# Altium PCB SourceSelection.PcbDoc
Units mil, origin at the board's own origin, x right, y up, seen from the top; angles counter-clockwise.
Board outline 4653.05 x 2238.44 mil, 2 copper layers (Top Layer, Bottom Layer); 39 components, 45 nets, 189 pads, 12 vias.
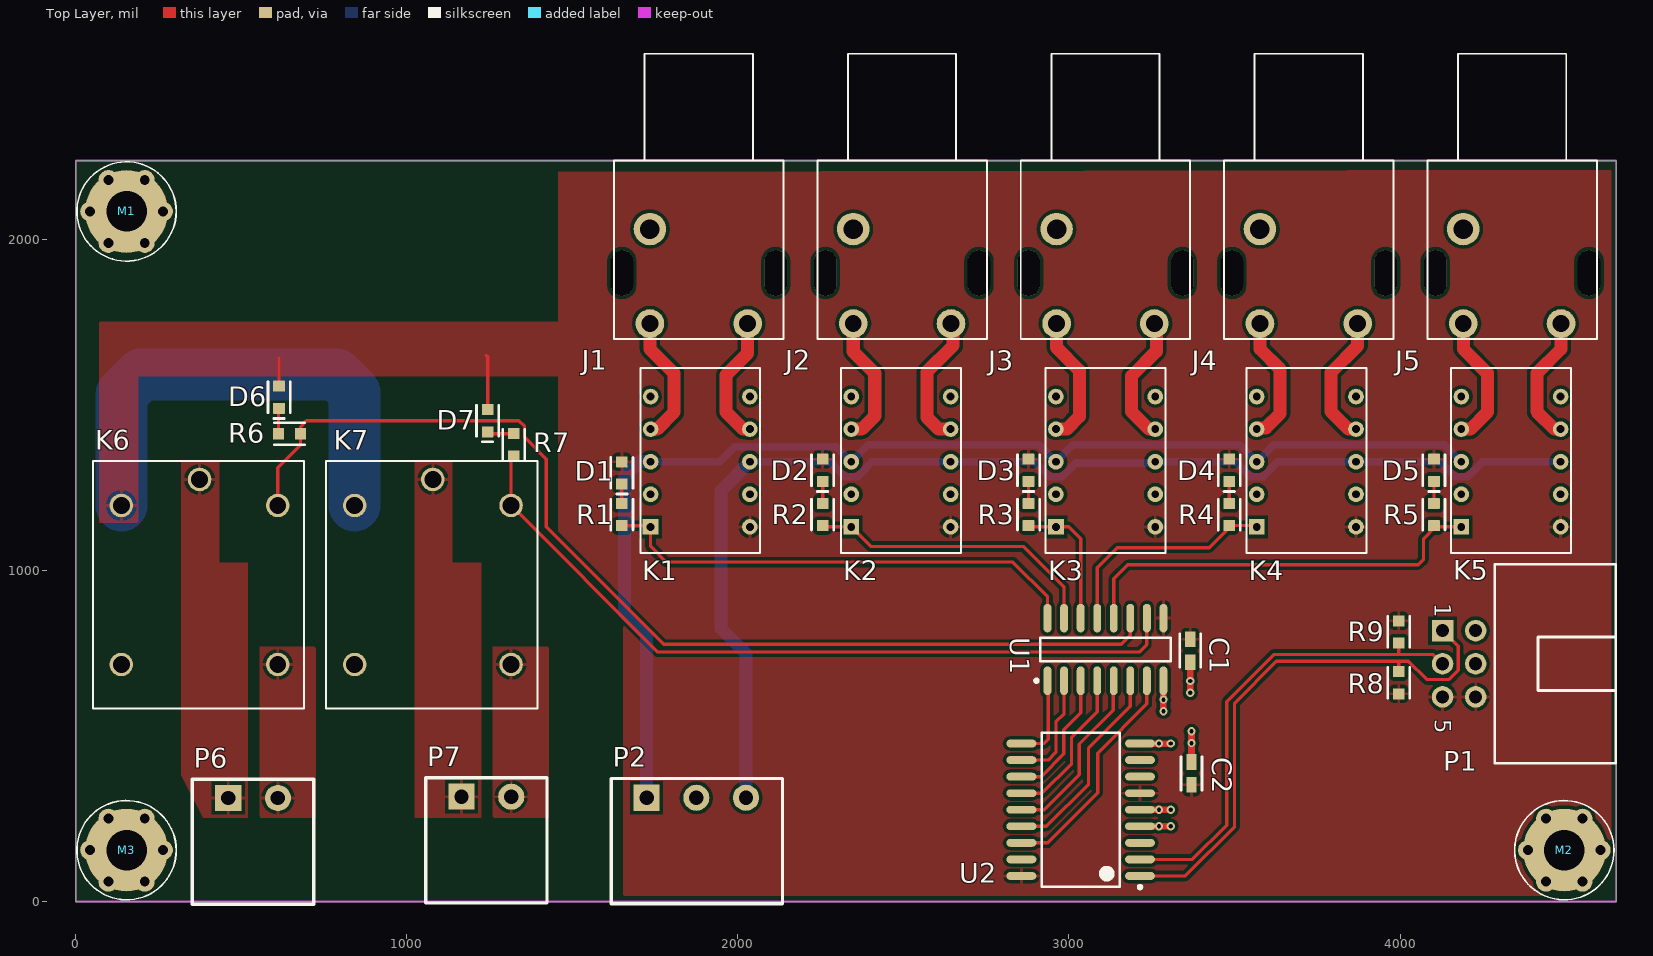
[diagram p0: Top Layer view]
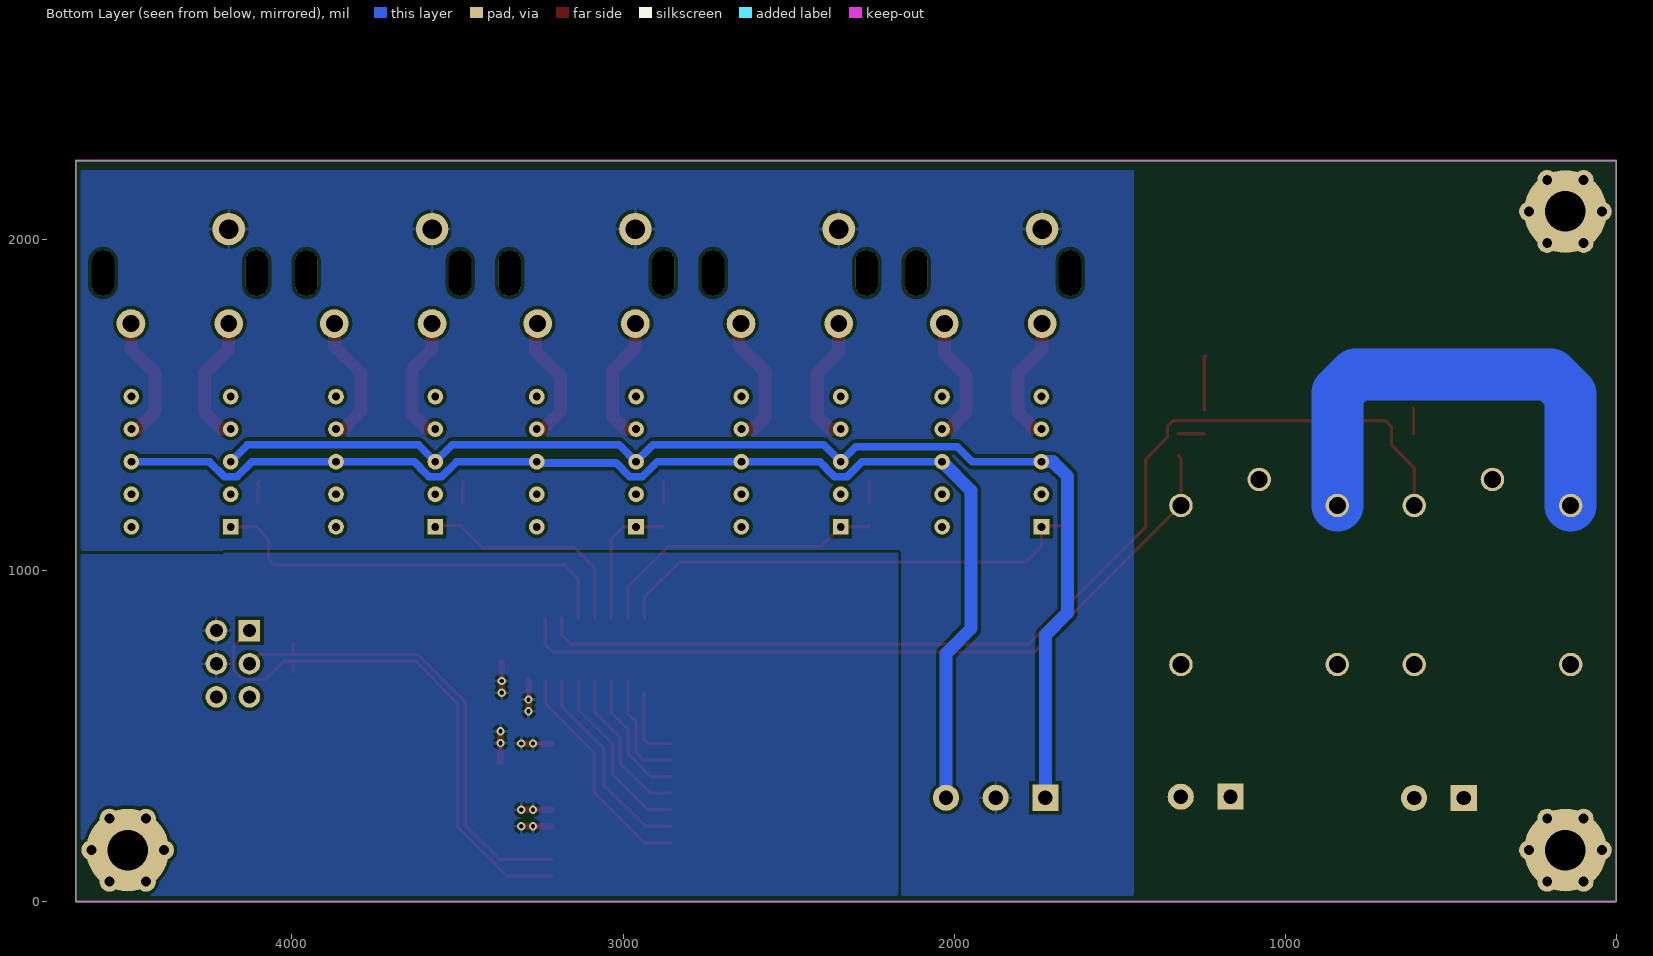
[diagram p1: Bottom Layer view, seen from below]
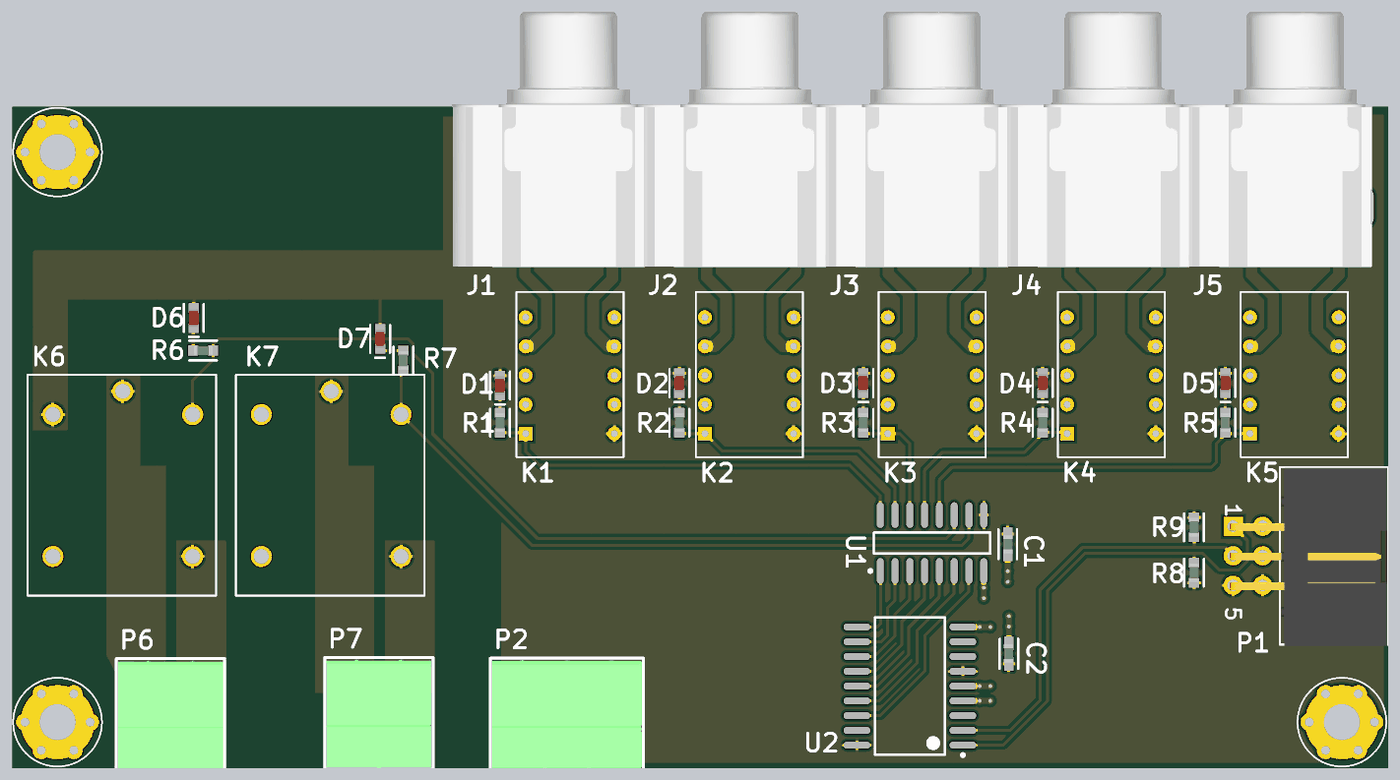
[diagram p2: 3D render of the assembled board from above, using the file's embedded part models]

## Layer stack, top to bottom
Top Solder: solder mask 0.4, Solder Resist, Dk 3.5
Top Layer: signal copper 1.4
Dielectric1: dielectric 12.6, FR-4, Dk 4.8
Bottom Layer: signal copper 1.4
Bottom Solder: solder mask 0.4, Solder Resist, Dk 3.5

## Board outline
0,0 4653.05,0 4653.05,2238.44 0,2238.44

## Design rules (kind name [scope] priority, off if disabled: settings)
Clearance [All] p1: gap=10
HoleSize [All] p1: absolutevalues=TRUE maxlimit=787.4 minlimit=12.99 maxpercent=80.000 minpercent=20.000
PolygonConnect [All] p1: connectstyle=Relief reliefconductorwidth=10 reliefentries=4 polygonreliefangle="90 Angle" airgapwidth=10
RoutingVias [All] p1: holewidth=28 width=50 viastyle="Through Hole" minholewidth=28 minwidth=50 maxholewidth=28 maxwidth=50
SilkToSolderMaskClearance SilkscreenOverComponentPads [IsPad] p1: minsilkscreentomaskgap=0 clearancetoexposedcopper=TRUE
SolderMaskExpansion [All] p1: expansion=4
Width [All] p1: maxlimit=393.7 minlimit=6 preferedwidth=10
28 further rules are at their usual default settings.

## Components (designator, comment, footprint, x,y, rotation, side; value= is the part's Value field where it differs from the comment)
C1 "GCM188R71C105KA64D" CAPC1608 3366.14,758.12 r90 top
C2 "GCM188R71C105KA64D" CAPC1608 3370.08,387.55 r270 top
D1 "LTST-C191KGKT" LEDC1608M_AK 1649.61,1295.28 r270 top
D2 "LTST-C191KGKT" LEDC1608M_AK 2255.91,1303.15 r270 top
D3 "LTST-C191KGKT" LEDC1608M_AK 2877.95,1303.15 r270 top
D4 "LTST-C191KGKT" LEDC1608M_AK 3484.25,1303.15 r270 top
D5 "LTST-C191KGKT" LEDC1608M_AK 4102.36,1303.15 r270 top
D6 "LTST-C191KGKT" LEDC1608M_AK 614.17,1523.62 r270 top
D7 "LTST-C191KGKT" LEDC1608M_AK 1244.09,1452.76 r270 top
J1 "RCA" PJRAS1X2S01AUX 1881.89,2238.44 r180 top
J2 "RCA" PJRAS1X2S01AUX 2496.06,2238.44 r180 top
J3 "RCA" PJRAS1X2S01AUX 3110.24,2238.44 r180 top
J4 "RCA" PJRAS1X2S01AUX 3724.41,2238.44 r180 top
J5 "RCA" PJRAS1X2S01AUX 4338.58,2238.44 r180 top
K1 "Relay DPDT Small Signal" DIP-P10 1736.22,1132.14 r180 top
K2 "Relay DPDT Small Signal" DIP-P10 2342.52,1132.14 r180 top
K3 "Relay DPDT Small Signal" DIP-P10 2960.63,1132.14 r180 top
K4 "Relay DPDT Small Signal" DIP-P10 3566.93,1132.14 r180 top
K5 "Relay DPDT Small Signal" DIP-P10 4185.04,1132.14 r180 top
K6 "Relay-Standby B+" RELAY_SPDT 610.24,1196.78 r270 top
K7 "Relay-Mains 240V" RELAY_SPDT 1314.96,1196.78 r270 top
M1 "M" MOUNTING 153.54,2084.89 r0 top
M2 "M" MOUNTING 4496.06,155.76 r0 top
M3 "M" MOUNTING 153.54,155.76 r0 top
P1 "Relays" IDC2.54-H6C 4228.35,718.75 r270 top
P2 "Audio out" PH_TERM_3 1622.05,-0.98 r0 top
P6 "Standby" PH_TERM_2 358.27,-1.72 r0 top
P7 "Mains" PH_TERM_2 1062.99,2.21 r0 top
R1 "CR0603-FX-1001ELF" RESC1608 1649.61,1169.29 r90 top
R2 "CR0603-FX-1001ELF" RESC1608 2255.91,1169.29 r90 top
R3 "CR0603-FX-1001ELF" RESC1608 2877.95,1169.29 r90 top
R4 "CR0603-FX-1001ELF" RESC1608 3484.25,1169.29 r90 top
R5 "CR0603-FX-1001ELF" RESC1608 4102.36,1169.29 r90 top
R6 "CR0603-FX-1001ELF" RESC1608 645.67,1413.39 r180 top
R7 "CR0603-FX-1001ELF" RESC1608 1322.83,1380.17 r90 top
R8 "CR0603-FX-1001ELF" RESC1608 3996.06,661.42 r270 top
R9 "CR0603-FX-1001ELF" RESC1608 3996.06,814.96 r90 top
U1 "ULN2003AD" D016_N 3110.24,762.06 r90 top
U2 "MCP23008-E/SO" SOIC-SO18_N 3035.43,277.81 r180 top

## Footprints (in the part's own frame and the unit in brackets; to place one, negate y for a bottom-side part, rotate by r counter-clockwise, add the part's x,y. Pads: shape width x height; smd on the part's side, far side on the other; paste and mask are expansions set on the pad)
CAPC1608 [mm] "Chip Capacitor, Non Polarised 1.6mm x 0.8mm x ?mm (0603)"
  rrect10% 1.2x0.8 smd: 1(-0.875,0) 2(0.875,0)
  silkscreen extent -1.28,-0.8 1.28,0.8, body extent -0.8,-0.43 0.8,0.39, height 0.86
D016_N [mm] "SOIC, 16-Leads, Body 9.9x3.9mm, Pitch 1.27mm, IPC Medium Density"
  oval 2.2x0.6 smd: 1(-2.4,4.445) 2(-2.4,3.175) 3(-2.4,1.905) 4(-2.4,0.635) 5(-2.4,-0.635) 6(-2.4,-1.905) 7(-2.4,-3.175) 8(-2.4,-4.445) 9(2.4,-4.445) 10(2.4,-3.175) 11(2.4,-1.905) 12(2.4,-0.635) 13(2.4,0.635) 14(2.4,1.905) 15(2.4,3.175) 16(2.4,4.445)
  silkscreen extent -2.52,-5 0.9,5.42, body extent -2,-5 2,5, height 1.75
DIP-P10 [mm]
  rect 1.2x1.2 hole 0.6: 1(0,0)
  round 1.2 hole 0.6: 2(0,-2.5) 3(0,-5) 4(0,-7.5) 5(0,-10) 6(-7.62,-10) 7(-7.62,-7.5) 8(-7.62,-5) 9(-7.62,-2.5) 10(-7.62,0)
  silkscreen extent -8.41,-12.18 0.79,2.02, body extent -8.38,-12.19 0.76,2.03, height 5.4
IDC2.54-H6C [mm] "Connector; IDC, Low Profile Male Header, Thru-Hole; 6 Position; Right Angle; Pitch 2.54 mm; Body 15.24 x 8.9 x 9.2 mm (LxWxH)"
  rect 1.65x1.65 hole 1: 1(-2.54,-2.54)
  round 1.65 hole 1: 2(-2.54,0) 3(0,-2.54) 4(0,0) 5(2.54,-2.54) 6(2.54,0)
  silkscreen extent -7.62,1.48 7.62,10.75, body extent -7.56,-2.85 7.71,10.7, height 9.43
LEDC1608M_AK [mm] "LED, Chip, 0603"
  rrect10% 0.85x0.9 smd: A(-0.85,0) K(0.85,0)
  silkscreen extent -1.18,-0.85 1.62,0.85, body extent -0.8,-0.4 0.8,0.39, height 1.09
MOUNTING [mil]
  round 250 hole 122.05: 1(0,0)
  round 60 hole 30: 2(-55,95.26) 3(55,95.26) 4(110,0) 5(55,-95.26) 6(-55,-95.26) 7(-110,0)
  silkscreen extent -150,-150 150,150
PH_TERM_2 [mm] "Phoenix Terminal 2 way pluggable"
  rect 2x2 hole 1.1: 1(2.6,8)
  round 2 hole 1.1: 2(6.41,8)
  silkscreen extent -0.15,-0.15 9.15,9.45, body extent 0,0 9.01,9.3, height 7.25
PH_TERM_3 [mm] "Phoenix Terminal 3 way pluggable"
  rect 2x2 hole 1.1: 1(2.6,8)
  round 2 hole 1.1: 2(6.41,8) 3(10.22,8)
  silkscreen extent -0.13,-0.12 13.03,9.48, body extent 0.03,0.03 12.84,9.32, height 7.25
PJRAS1X2S01AUX [mm] "DUAL RCA PCB"
  oval 1.7x3.5 hole 1.7 slot 3.5 at 90 deg unplated: 0(-5.896,8.623) 0(5.896,8.623)
  round 2.5 hole 1.5: 1(3.75,5.25)
  round 2.2 hole 1.3: 2(-3.75,12.5) 3(3.75,12.5)
  silkscreen extent -6.5,-8.2 6.5,13.7, body extent -6.47,-8.17 10.03,13.72, height 28.5
RELAY_SPDT [mm] "JQ3FF-24"
  round 1.8 hole 1.3: 1(0,0) 2(-2,-6) 3(0,-12) 4(12.2,-12) 5(12.2,0)
  silkscreen extent -3.43,-14.18 15.57,2.02, body extent -3.43,-14.1 15.49,2.03, height 15.5
RESC1608 [mm] "Chip Resistor, 1.6mm x 0.8mm x ?mm (0603)"
  rrect10% 0.85x0.9 smd: 1(-0.85,0) 2(0.85,0)
  silkscreen extent -1.18,-0.85 1.18,0.85, body extent -0.8,-0.4 0.8,0.4, height 0.4
SOIC-SO18_N [mm] "SOIC, 18-Leads, Body 11.5x7.5mm, Pitch 1.27mm, IPC Medium Density"
  oval 2.3x0.6 smd: 1(-4.55,5.08) 2(-4.55,3.81) 3(-4.55,2.54) 4(-4.55,1.27) 5(-4.55,0) 6(-4.55,-1.27) 7(-4.55,-2.54) 8(-4.55,-3.81) 9(-4.55,-5.08) 10(4.55,-5.08) 11(4.55,-3.81) 12(4.55,-2.54) 13(4.55,-1.27) 14(4.55,0) 15(4.55,1.27) 16(4.55,2.54) 17(4.55,3.81) 18(4.55,5.08)
  silkscreen extent -4.67,-5.9 3,6.05, body extent -3.8,-5.87 3.8,5.87, height 2.65

## Part data
C1 C2: "Multilayer Ceramic Capacitors MLCC - SMD/SMT 0603 1.0uF 16volts X7R 10%"
D1 D2 D3 D4 D5 D6 D7: "LED GREEN CLEAR 0603 SMD"
J1 J2 J3 J4 J5: library part "RCA Dual PCB"
K6 K7: library part "Relay SPDT"
M1 M2 M3: library part MOUNTING, "MOUNTING HOLE - NON INSTALLABLE"
P1: library part "Header 3X2H", "Header, 3-Pin, Dual row, Right Angle"
P2: library part "Header 3", "Header, 3-Pin"
P6 P7: library part "Header 2", "Header, 2-Pin"
R1 R2 R3 R4 R5 R6 R7 R8 R9: "RES SMD 1K OHM 1% 1/10W 0603"
U1: "Darlington Transistor Array"
U2: "8-Bit I/O Expander with Serial Interface, 18-Pin SOIC, Extended Temperature"

## Via types
v1: diameter 25, hole 13, Top Layer to Bottom Layer, tented both sides, 12 vias

## Nets (pads, with @x,y where several pads share a name; then routed paths per layer and width w, separated by ;. In a path a pad name is that pad's centre, name@x,y a point inside that pad or via, vN(x,y) a via of type N, cw(c..) or ccw(c..) an arc to the next point about the centre after c; other vN are vias at no path point)
AGND: J1.1 J2.1 J3.1 J4.1 J5.1 P2.2
AU_L: K1.3 K2.3 K3.3 K4.3 K5.3 P2.1 | length 3709.2
  Bottom Layer w23.62: K1.3 1945.35,1328.99 1990.79,1374.42 2297.09,1374.42 K2.3 2393.7,1380.17 2909.45,1380.17 K3.3 3011.81,1380.17 3515.75,1380.17 K4.3 3618.11,1380.17 4133.86,1380.17 K5.3
  Bottom Layer w39.37: P2.1 1724.41,805.36 1657.48,872.29 1657.48,1284.68 1701.78,1328.99 K1.3
AU_R: K1.8 K2.8 K3.8 K4.8 K5.8 P2.3 | length 3683.4
  Bottom Layer w23.62: K1.8 2278.27,1328.99 2323.7,1283.55 2361.34,1283.55 2387.95,1310.17 2387.95,1311.43 2405.51,1328.99 K2.8 2896.38,1328.99 2941.81,1283.55 2979.45,1283.55 3020.94,1325.05 3256.69,1325.05 K3.8 3502.68,1328.99 3548.11,1283.55 3585.75,1283.55 3612.36,1310.17 3612.36,1311.43 3629.92,1328.99 K4.8 4120.79,1328.99 4166.22,1283.55 4203.86,1283.55 4249.29,1328.99 K5.8
  Bottom Layer w39.37: P2.3 2024.41,749.46 1948.82,825.05 1948.82,1241.58 K1.8
GND: C1.1 C2.1 P1.2 P1.4 U1.8 U2.4 U2.5 U2.9 | length 555.1
  Top Layer w19.68: U2.4 v1(3307.09,227.81) ; U2.5 v1(3307.09,277.81) ; U2.9 v1(3307.09,477.81) ; v1(3285.24,575.05) U1.8 ; v1(3366.14,631.15) C1.1 ; C2.1 v1(3370.08,514.52)
  other v1: 3271.65,227.81 3271.65,277.81 3271.65,477.81 3370.08,479.08 3285.24,610.48 3366.14,666.58
NetD1_K: D1.K R1.2 | length 59.1
  Top Layer w10: R1.2 D1.K
NetD2_K: D2.K R2.2 | length 66.9
  Top Layer w10: R2.2 D2.K
NetD3_K: D3.K R3.2 | length 66.9
  Top Layer w10: R3.2 D3.K
NetD4_K: D4.K R4.2 | length 66.9
  Top Layer w10: R4.2 D4.K
NetD5_K: D5.K R5.2 | length 68.6
  Top Layer w10: D5.K@4098.43,1269.68 4102.36,1265.75 R5.2
NetD6_K: D6.K R6.2 | length 77.6
  Top Layer w10: R6.2 612.2,1488.19 D6.K
NetD7_K: D7.K R7.2 | length 76.9
  Top Layer w10: D7.K@1246.06,1413.39 1246.31,1413.63 R7.2
NetJ1_2: J1.2 K1.7 | length 387.5
  Top Layer w39.37: J1.2 2029.53,1656.36 1964.57,1591.4 1964.57,1478.59 2015.75,1427.41 K1.7
NetJ1_3: J1.3 K1.4 | length 390
  Top Layer w39.37: J1.3 1734.25,1669.54 1807.09,1596.7 1807.09,1478.59 1755.91,1427.41 K1.4
NetJ2_2: J2.2 K2.7 | length 404.9
  Top Layer w39.37: K2.7 2606.3,1427.41 2570.87,1462.84 2570.87,1600.64 2649.61,1679.38 2649.61,1740.4 J2.2
NetJ2_3: J2.3 K2.4 | length 393.6
  Top Layer w39.37: K2.4 2374.02,1427.41 2413.39,1466.78 2413.39,1596.7 2348.43,1661.66 J2.3
NetJ3_2: J3.2 K3.7 | length 393
  Top Layer w39.37: J3.2 3263.78,1740.4 3263.78,1662.67 3188.98,1587.87 3188.98,1480.32 3241.88,1427.41 K3.7
NetJ3_3: J3.3 K3.4 | length 395.9
  Top Layer w39.37: K3.4 2993.31,1427.41 3031.5,1465.6 3031.5,1604.58 2962.6,1673.47 J3.3
NetJ4_2: J4.2 K4.7 | length 396.9
  Top Layer w10: J4.2@3872.05,1726.62 J4.2
  Top Layer w39.37: K4.7 3844.24,1427.41 3791.34,1480.31 3791.34,1598.43 3872.05,1679.13 J4.2@3872.05,1726.62
NetJ4_3: J4.3 K4.4 | length 385.7
  Top Layer w39.37: K4.4@3566.93,1431.35 3594.49,1431.35 3637.8,1474.66 3637.8,1608.51 3576.77,1669.54 J4.3
NetJ5_2: J5.2 K5.7 | length 389.7
  Top Layer w39.37: K5.7 4466.29,1427.41 4413.39,1480.32 4413.39,1596.7 4486.22,1669.54 J5.2
NetJ5_3: J5.3 K5.4 | length 397.8
  Top Layer w39.37: K5.4 4212.6,1427.41 4263.78,1478.59 4263.78,1596.7 4190.94,1669.54 J5.3
NetK1_1: K1.1 R1.1 U1.16 | length 1473.8
  Top Layer w10: R1.1 1732.53,1135.83 K1.1 1736.22,1073.08 1783.46,1025.84 2830.71,1025.84 2935.24,921.31 U1.16
NetK2_1: K2.1 R2.1 U1.15 | length 899.8
  Top Layer w10: R2.1 2259.6,1132.14 K2.1 2401.57,1073.08 2862.2,1073.08 2985.24,950.05 U1.15
NetK3_1: K3.1 R3.1 U1.14 | length 413.6
  Top Layer w10: R3.1 2881.64,1132.14 K3.1 2999.8,1132.14 3035.24,1096.7 U1.14
NetK4_1: K4.1 R4.1 U1.13 | length 686.6
  Top Layer w10: U1.13 3085.24,1008.71 3145.67,1069.14 3423.25,1069.14 3490.18,1136.07 K4.1@3566.93,1136.07
NetK5_1: K5.1 R5.1 U1.12 | length 1270.9
  Top Layer w10: U1.12 3135.24,976.03 3177.17,1017.96 4055.12,1017.96 4070.87,1033.71 4070.87,1096.7 4106.3,1132.14 K5.1
NetK6_1: K6.1 R6.1 U1.11 | length 3262.1
  Top Layer w10: K6.1 610.24,1311.27 679.13,1380.17 R6.1 679.13,1435.04 696.85,1452.76 1338.39,1452.76 1355.55,1435.6 1355.55,1402.57 1421.26,1336.86 1421.26,1132.14 1775.59,777.81 3158.31,777.81 3185.24,804.73 U1.11
NetK6_2: K6.2 P6.1
NetK6_5: K6.5 P6.2
NetK7_1: K7.1 R7.1 U1.10 | length 2345.9
  Top Layer w10: R7.1 1314.96,1338.83 K7.1 1757.56,754.18 3212.6,754.18 3235.24,776.82 U1.10
NetK7_2: K7.2 P7.1
NetK7_5: K7.5 P7.2
NetM1_1: M1.1 M1.2 M1.3 M1.4 M1.5 M1.6 M1.7
NetM2_1: M2.1 M2.2 M2.3 M2.4 M2.5 M2.6 M2.7
NetM3_1: M3.1 M3.2 M3.3 M3.4 M3.5 M3.6 M3.7
NetU1_1: U1.1 U2.10 | length 227.7
  Top Layer w10: U2.10 2924.41,477.81 2937.01,490.4 U1.1@2937.01,632.14
NetU1_2: U1.2 U2.11 | length 340.7
  Top Layer w10: U2.11 2937.4,427.81 2960.63,451.03 2960.63,543.31 2985.24,567.91 U1.2
NetU1_3: U1.3 U2.12 | length 398.7
  Top Layer w10: U2.12 2915.69,377.81 2984.25,446.37 2984.25,519.69 3035.24,570.67 U1.3
NetU1_4: U1.4 U2.13 | length 471
  Top Layer w10: U2.13 2918.5,327.81 3007.87,417.18 3007.87,496.06 3085.24,573.43 U1.4
NetU1_5: U1.5 U2.14 | length 545.7
  Top Layer w10: U2.14 2925.2,277.81 3031.5,384.1 3031.5,476.38 3133.86,578.74 3133.86,666.19 U1.5
NetU1_6: U1.6 U2.15 | length 620.3
  Top Layer w10: U2.15 2931.89,227.81 3059.06,354.97 3059.06,464.57 3185.24,590.75 U1.6
NetU1_7: U1.7 U2.16 | length 693.1
  Top Layer w10: U2.16 2935.43,177.81 3086.61,328.99 3086.61,448.82 3235.24,597.44 U1.7
SCL: P1.1 R8.1 U2.1 | length 1654.3
  Top Layer w10: U2.1 3351.18,77.81 3500,226.62 3500,599.91 3626.75,726.66 3996.06,726.66 ; R8.1 3996.06,726.66 ; P1.1 4175.83,771.27 4175.83,699.08 4148.01,671.27 4080.87,671.27 4025.47,726.66 3996.06,726.66
SDA: P1.3 R9.1 U2.2 | length 1435.2
  Top Layer w10: U2.2 3372.9,127.81 3476.38,231.29 3476.38,604.58 3618.46,746.66 3996.06,746.66 ; R9.1 3996.06,746.66 ; P1.3 4100.43,746.66 3996.06,746.66
VCC: C1.2 C2.2 D1.A D2.A D3.A D4.A D5.A D6.A D7.A K1.10 K2.10 K3.10 K4.10 K5.10 K6.3 K7.3 P1.5 P1.6 R8.2 R9.2 U1.9 U2.6 U2.18 | length 1679.5
  Top Layer w10: D6.A 614.17,1641.73 ; 1240.16,1649.61 1244.09,1645.67 D7.A
  Bottom Layer w157.48: K6.3 137.8,1533.71 196.85,1592.77 787.4,1592.77 842.52,1537.65 K7.3
pads on no net: J1.0 J2.0 J3.0 J4.0 J5.0 K1.2 K1.5 K1.6 K1.9 K2.2 K2.5 K2.6 K2.9 K3.2 K3.5 K3.6 K3.9 K4.2 K4.5 K4.6 K4.9 K5.2 K5.5 K5.6 K5.9 K6.4 K7.4 U2.3 U2.7 U2.8 U2.17

## Polygon pours and split planes (outlines as drawn)
AGND on Bottom Layer "AGND" (solid, remove dead copper, pour order 11): 4637.8,2209.74 4637.8,1057.33 4291.34,1057.33 2169.29,1057.33 2169.29,17.96 1456.69,17.96 1456.69,2209.74
GND on Bottom Layer "GND" (solid, remove dead copper, pour order 10): 4637.8,1053.4 4637.8,17.96 2291.34,17.96 2259.84,17.96 2169.29,17.96 2169.29,1053.4 4208.66,1053.4
NetK7_2 on Top Layer "MAINS" (solid, remove dead copper, pour order 16): 1224.46,254.18 1224.46,1023.62 1137.8,1023.62 1137.8,1333.81 1023.62,1333.81 1023.62,254.18
NetK7_5 on Top Layer "MAINS" (solid, remove dead copper, pour order 14): 1429.13,254.18 1429.13,769.73 1259.84,769.73 1259.84,254.18
VCC on Top Layer "VCC" (solid, remove dead copper, pour order 17): 188.98,1143.95 188.98,1728.35 71.07,1728.35 71.07,1143.95
NetK6_5 on Top Layer "MAINS" (solid, remove dead copper, pour order 14): 724.41,254.18 724.41,769.73 555.12,769.73 555.12,254.18
NetK6_2 on Top Layer "MAINS" (solid, remove dead copper, pour order 16): 519.73,254.18 519.73,1023.62 433.07,1023.62 433.07,1333.81 318.9,1333.81 318.9,254.18 318.9,381.89 385.83,254.18
VCC on Top Layer "VCC" (solid, remove dead copper, pour order 12): 1456.69,2204.69 1456.69,1118.11 1653.54,921.26 1653.54,17.96 4637.8,17.96 4637.8,2211.23
VCC on Top Layer "VCC" (solid, remove dead copper, pour order 18): 71.07,1586.61 1622.05,1586.61 1622.05,1751.97 70.87,1751.97

## Keep-outs
Keep-Out Layer:
  the board outline again, w5.91

## Text inside footprints (layer, text, board x,y; h text height)
P1: Top Overlay "5" at 4104.33,551.43 h50 r270; Top Overlay "1" at 4104.33,901.82 h50 r270